# Altium PCB LED_EN_Kian_V2_troid.PcbDoc
Units mm, origin at the board's own origin, x right, y up, seen from the top; angles counter-clockwise.
Board outline 50.6 x 77.19 mm, 2 copper layers (Top Layer, Bottom Layer); 37 components, 17 nets, 103 pads, 239 vias.
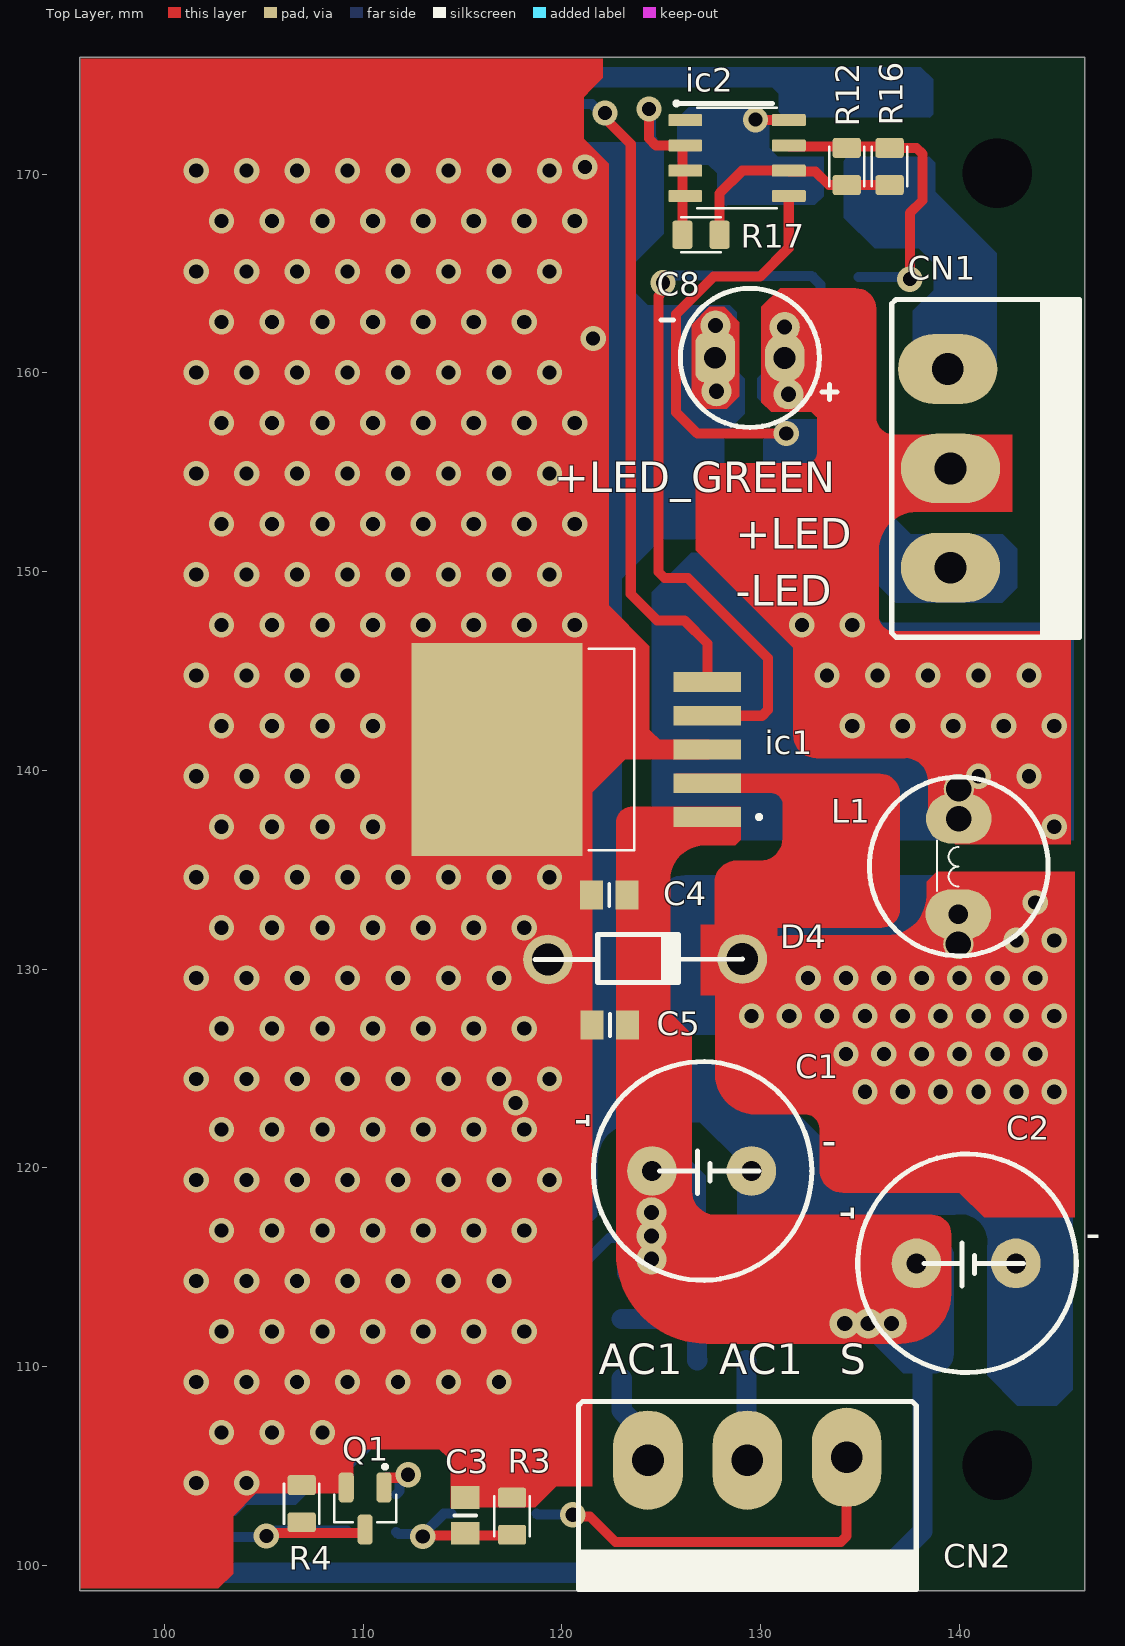
[diagram p0: Top Layer view]
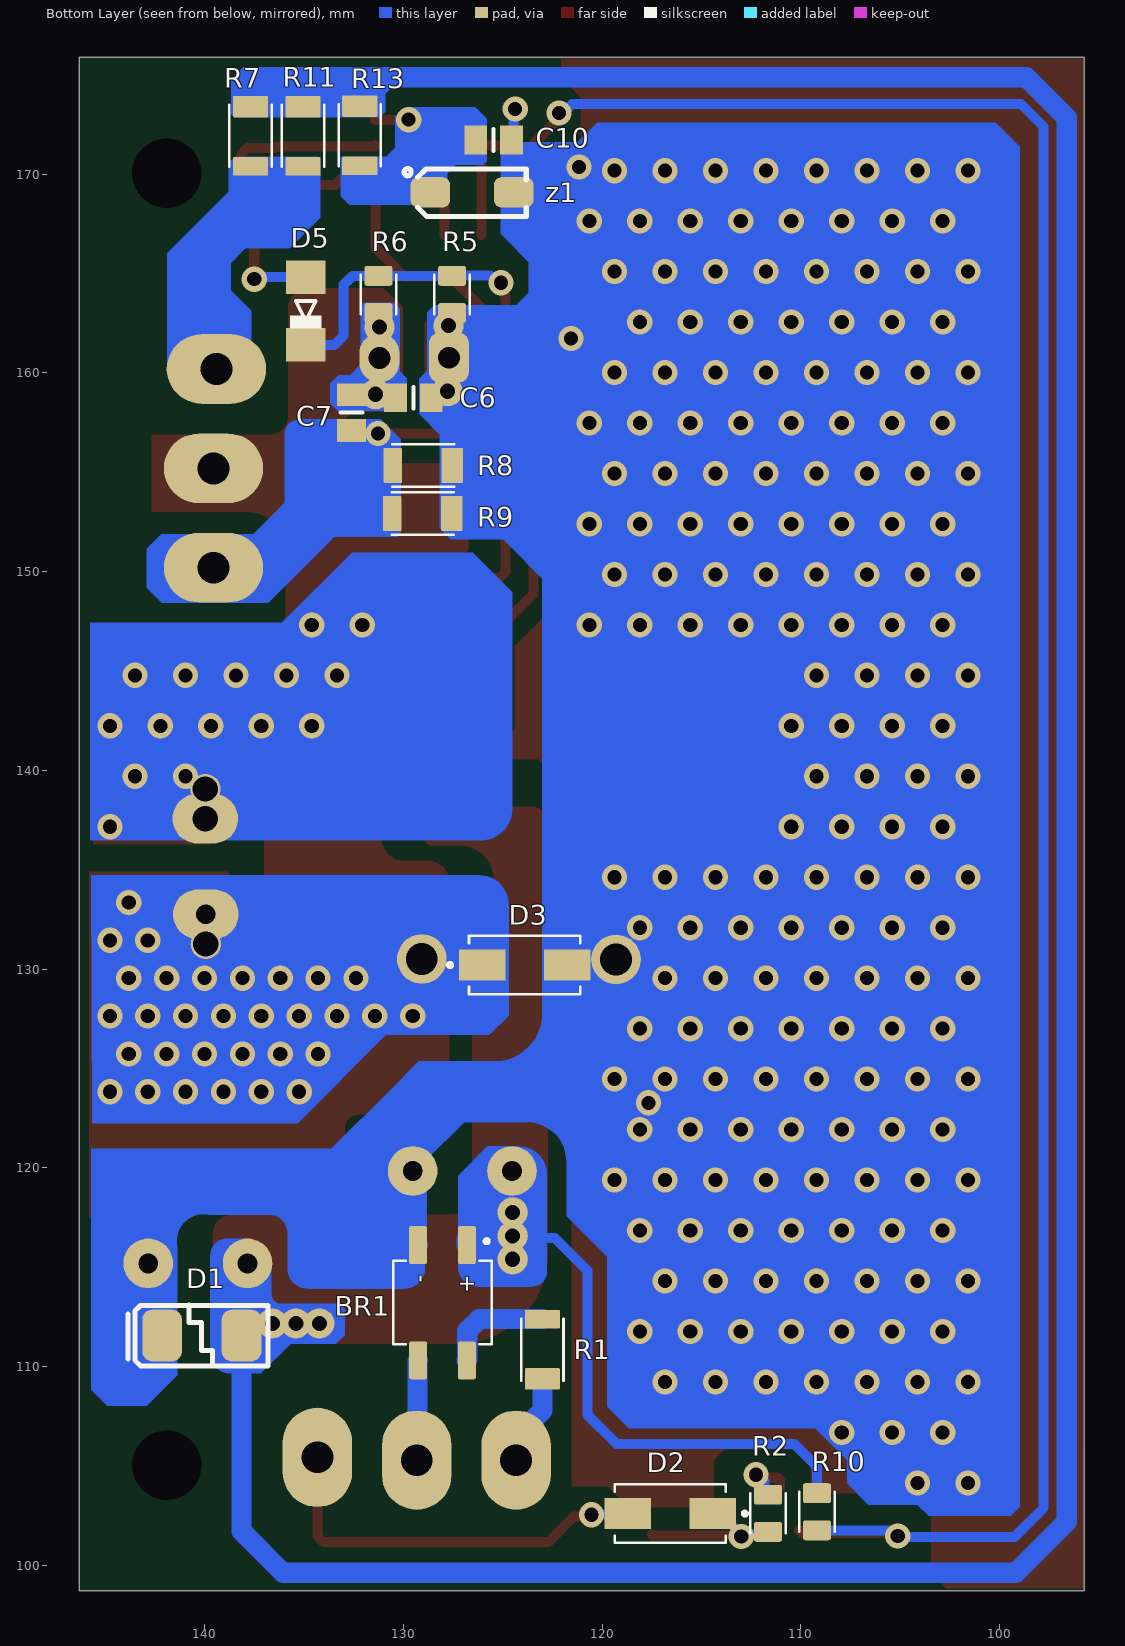
[diagram p1: Bottom Layer view, seen from below]
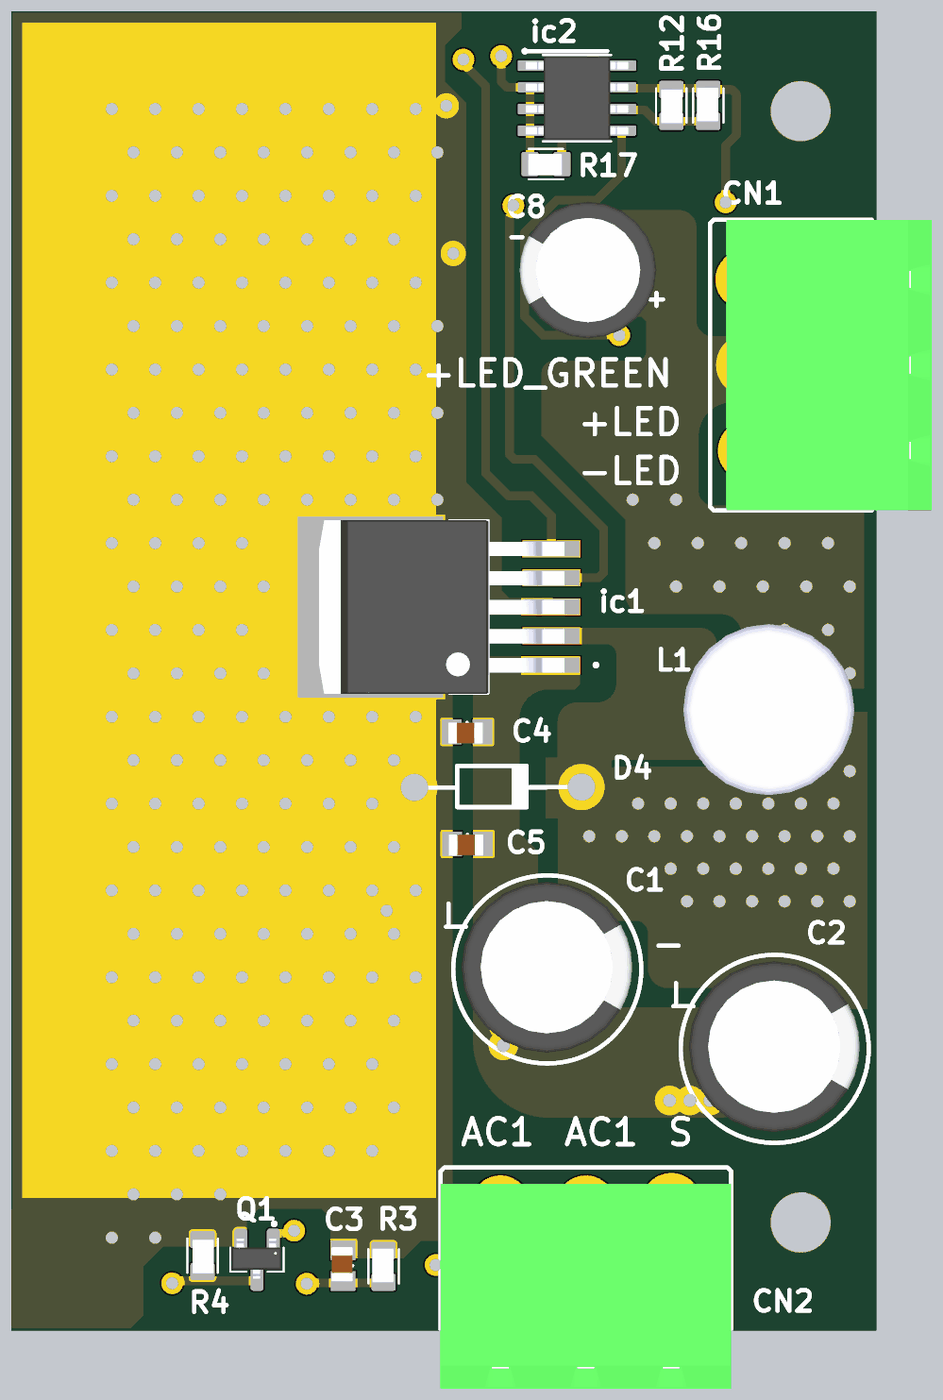
[diagram p2: 3D render of the assembled board from above, using the file's embedded part models]
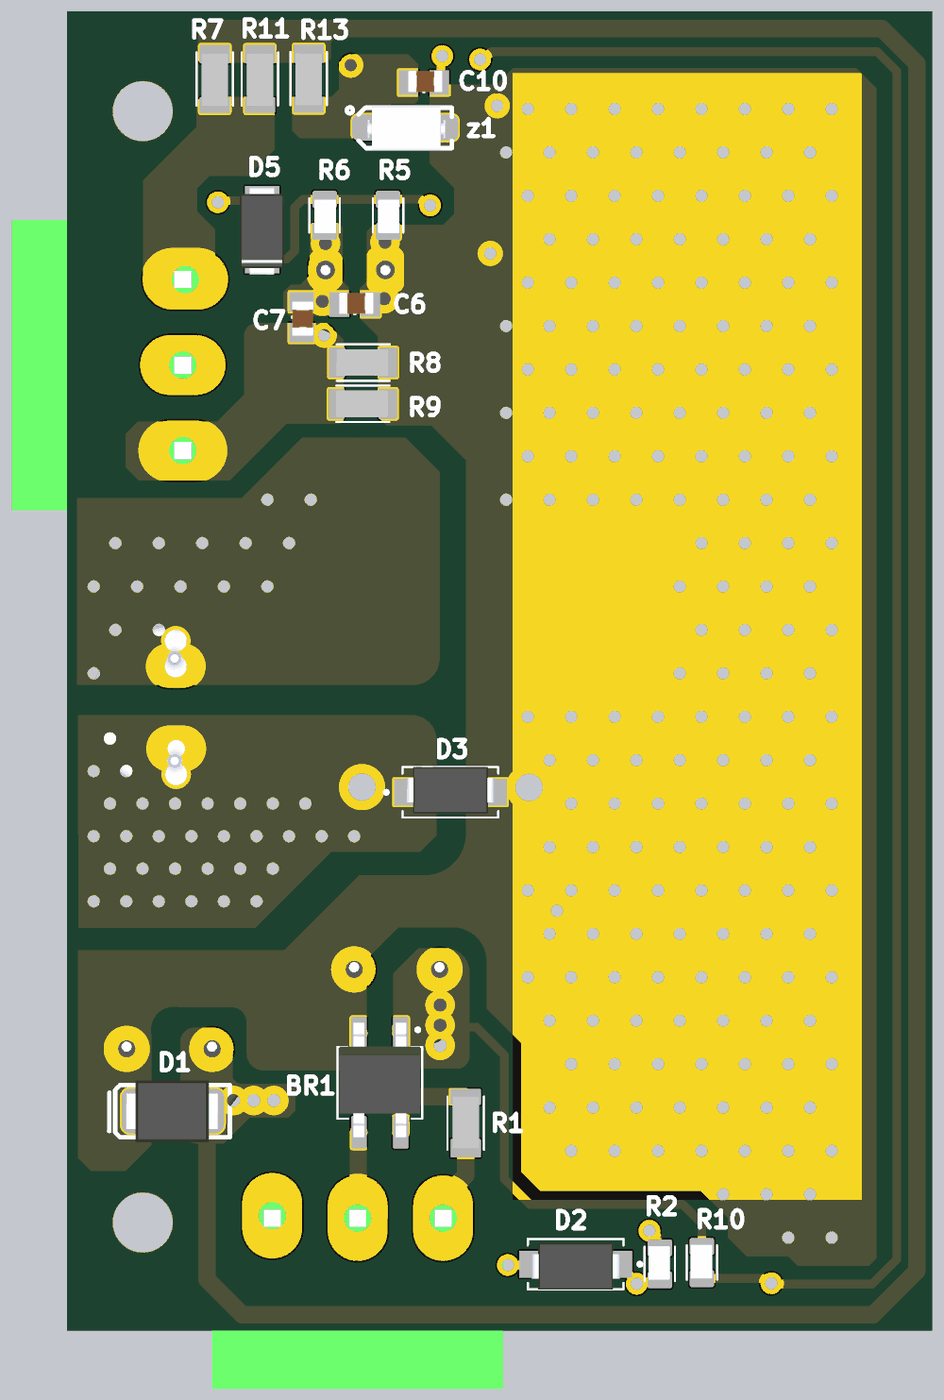
[diagram p3: 3D render of the assembled board from below, using the file's embedded part models]

## Layer stack, top to bottom
Top Solder: solder mask 0.0102, Solder Resist, Dk 3.5
Top Layer: signal copper 0.0356
Dielectric 1: dielectric 0.32, FR-4, Dk 4.8
Bottom Layer: signal copper 0.0356
Bottom Solder: solder mask 0.0102, Solder Resist, Dk 3.5

## Board outline
95.733,98.704 95.733,175.895 146.329,175.895 146.329,98.704

## Design rules (kind name [scope] priority, off if disabled: settings)
Clearance [All] p1: gap=0.381 ignorepadtopadclearanceinfootprint=FALSE
PolygonConnect [All] p1: connectstyle=Relief reliefconductorwidth=0.254 reliefentries=4 polygonreliefangle="90 Angle" airgapwidth=0.254
RoutingVias [All] p1: holewidth=0.711 width=1.27 viastyle="Through Hole" minholewidth=0.711 minwidth=1.27 maxholewidth=0.711 maxwidth=1.27
SolderMaskExpansion [All] p1: expansion=0.102 istentingtop=FALSE
Width [All] p1: maxlimit=2.54 minlimit=0.254 preferedwidth=0.254 minimp=50.000000 maximp=50.000000 favimp=50.000000
30 further rules are at their usual default settings.

## Classes and differential pairs
component class U_LED_EN_Kian_V2_SWITCHING: BR1 C1 C2 C3 C4 C5 C6 C7 C8 C10 D1 D2 D3 D4 D5 ic1 ic2 L1 Q1 R1 R2 R3 R4 R5 R6 R7 R8 R9 R10 R11 R13 R16 R17 z1
component class U_LED_EN_Kian_V2_CONECTOR: CN1 CN2

## Components (designator, comment, footprint, x,y, rotation, side; value= is the part's Value field where it differs from the comment)
BR1 "mb6s" MB6S/SMD 128.676,113.208 r90 bottom
C1 "330uF-50V" CAP-EL_P5MM 124.53,119.827 r0 top
C2 "330uF-50V" CAP-EL_P5MM 137.84,115.179 r0 top
C3 "100nF" CAP-0805 115.16,103.429 r270 top
C4 "100nF" CAP-0805 121.463,133.753 r0 top
C5 "100nF" CAP-0805 121.489,127.199 r0 top
C6 "100nF" CAP-0805 128.579,158.728 r0 bottom
C7 "100nF" CAP-0805 132.635,157.074 r90 bottom
C8 "1000uF-10V" CAP-EL-P3.5MM 127.716,160.757 r0 top
C10 "100nF" CAP-0805 124.54,171.708 r0 bottom
CN1 "LED_OUT" CONECTOR/FONIX/3PIN 139.565,150.198 r90 top
CN2 "INPUT-24-S" CONECTOR/FONIX/3PIN 124.337,105.283 r0 top
D1 "TVS-40V" TVS-5V-SMD 138.151,111.557 r0 bottom
D2 "M7" DIOD/1N4007/SMD 114.421,102.591 r0 bottom
D3 "1N5822" DIOD/1N4007/SMD 126.067,130.2 r180 bottom
D4 "1N5822" DIOD/1N4007/DIP 129.107,130.484 r180 top
D5 "1N4148" mini_melf 134.973,163.263 r90 bottom
ic1 "lm2576" lm2576 121.048,142.191 r180 top
ic2 "LM358" SOP-8 129.199,170.688 r0 top
L1 "100uH-3A" inductor-9*12 139.955,132.766 r90 top
Q1 "C945" SOT23 111.049,103.917 r270 top (schematic designator T1)
R1 "0R" RES/1206 122.885,110.846 r90 bottom
R2 "15K" RES/0805 112.592,103.66 r270 bottom
R3 "240K" RES/0805 116.567,103.513 r270 top
R4 "15K" RES/0805 107.842,102.045 r90 top
R5 "4.7K" RES/0805 126.625,162.904 r90 bottom
R6 "15K" RES/0805 130.334,162.904 r90 bottom
R7 "4.7K" RES/1206 137.828,171.933 r270 bottom
R8 "0.1R" RES/1206 129.014,155.473 r0 bottom
R9 "0.1R" RES/1206 129.039,153.06 r0 bottom
R10 "15K" RES/0805 110.128,103.736 r270 bottom
R11 "4.7K" RES/1206 135.186,171.933 r270 bottom (schematic designator R?)
R12 "100K" RES/0805 135.274,169.34 r90 top (schematic designator R?)
R13 "1K" RES/1206 132.334,171.958 r270 bottom
R16 "10K" RES/0805 135.566,171.436 r270 top
R17 "470R" RES/0805 125.956,166.021 r0 top
z1 "27v" DIOD/RS1J 126.473,169.194 r180 bottom

## Footprints (in the part's own frame and the unit in brackets; to place one, negate y for a bottom-side part, rotate by r counter-clockwise, add the part's x,y. Pads: shape width x height; smd on the part's side, far side on the other; paste and mask are expansions set on the pad)
CAP-0805 [mm]
  rect 1.15x1.45 smd: 1(0.025,-0.022) 2(1.825,-0.022)
  silkscreen extent 0.93,-0.57 0.93,0.53, body extent -0.17,-0.71 1.84,0.54, height 0.94
CAP-EL-P3.5MM [mm]
  oval 2x2.5 hole 1.1: +(3.5,0)
  rrect50% 2x2.5 hole 1.1: -(0,0.01)
  silkscreen extent -2.73,-3.5 6.13,3.5, body extent -2.25,-4 5.75,4, height 11.5
CAP-EL_P5MM [mm]
  round 2.5 hole 1: +(0.01,0.01) -(5.01,0.01)
  silkscreen extent -2.95,-5.49 8.05,5.51, body extent -2.48,-4.86 7.52,5.14, height 16
CONECTOR/FONIX/3PIN [mm]
  oval 3.5x5 hole 1.6: 1(0,0) 2(5,0) 3(10,0.144)
  silkscreen extent -3.5,-6.5 13.5,2.96, body extent -3.5,-10 13.5,2, height 8.8
DIOD/1N4007/DIP [mm]
  round 2.5 hole 1.6: A(9.8,0) K(0.025,-0.021)
  silkscreen extent 0.02,-1.26 10.46,1.15
DIOD/1N4007/SMD [mm]
  rect 2.33x1.56 smd: A(4.299,0) K(0.019,0)
  silkscreen extent -1.7,-1.48 4.96,1.48, body extent -0.44,-1.24 4.76,1.49, height 2.6
DIOD/RS1J [mm]
  rrect50% 2x1.524 smd: A(2.013,-0.106) K(-2.178,-0.106)
  silkscreen extent -3.5,-1.31 2.65,1.09, body extent -2.32,-1.44 2.28,1.16, height 2.1
inductor-9*12 [mm]
  oval 2.5x3.3 hole 1: 1(-0.01,0)
  oval 2.5x3.3 hole 1.27: 2(4.8,-0.025)
  silkscreen extent -2.1,-4.53 6.9,4.47, body extent -2.73,-5.09 7.27,4.91, height 12
lm2576 [mm]
  rect 3.4x1 smd paste-3 mask+0: 1(-6.282,4.543) 2(-6.282,2.843) 3(-6.282,1.143) 4(-6.282,-0.557) 5(-6.282,-2.257)
  rect 8.6x10.7 smd paste-6 mask+0: 6(4.318,1.143)
  silkscreen extent -8.98,-3.94 -0.3,6.22, body extent -7.04,-3.92 7.31,6.24, height 4.65
MB6S/SMD [mm]
  rrect23% 1.91x0.91 smd: +(2.9,-1.86) -(2.9,0.59) F(-2.9,0.59) N(-2.9,-1.86)
  silkscreen extent -2.1,-3.12 3.2,1.85, body extent -3.19,-3 3.51,1.72, height 2.9
mini_melf [mm]
  rect 1.7x2 smd: A(1.557,-0.049) K(-1.843,-0.049)
  silkscreen extent -1.01,-0.84 0.36,0.74, body extent -2.79,-1.31 2.35,1.25, height 2.5
RES/0805 [mm]
  rrect25% 1x1.42 smd: 1(0.113,0.933) 2(1.983,0.933)
  silkscreen extent 0.05,0.04 2.05,1.82, body extent 0,0.28 2,1.53, height 0.6
RES/1206 [mm]
  rrect14% 1.09x1.77 smd: 1(-1.469,0.131)
  rrect14% 0.94x1.77 smd: 2(1.536,0.131)
  silkscreen extent -1.55,-0.93 1.55,1.2, body extent -1.51,-0.65 1.59,0.9, height 0.55
SOP-8 [mm]
  rrect25% 1.71x0.61 smd: 1(-2.986,2.032) 2(-2.986,0.762) 3(-2.986,-0.508) 4(-2.986,-1.778) 5(2.224,-1.778) 6(2.224,-0.508) 7(2.224,0.762) 8(2.224,2.032)
  silkscreen extent -3.53,-2.4 1.62,2.98, body extent -3.38,-2.32 2.62,2.58, height 1.75
SOT23 [mil]
  rrect50% 60x30 smd: 1(0.24,0) 2(0.24,-74.8) 3(83.7,-37.4)
  silkscreen extent -45,-99 70,24, body extent -7,-96 86,19, height 44
TVS-5V-SMD [mm]
  rrect50% 2x2.6 smd: 1(4,0) 2(0,0)
  silkscreen extent -1.33,-1.53 5.72,1.54, body extent -0.66,-1.79 4.74,1.83, height 2.43

## Part data
BR1: library part "BRIDGE RECTIFIERS/SMD"
C1 C2 C8: library part cap-electrolit
C3 C4 C5 C6 C7 C10: library part cap_smd
CN1 CN2: library part CONECTOR/FONIX/3PIN
D1: library part TVS-SMD
D2 D3 D4 D5: library part DIOD/RECTIFIERS
L1: library part inductor
Q1: library part NPN
R1 R2 R3 R4 R5 R6 R7 R8 R9 R10 R11 R12 R13 R16 R17: library part RES/SMD
z1: library part zener-0.5w

## Free pads (board coordinates)
  round 1.524 hole 3.5: 13(141.91,105.029) 13(141.91,170.053)
  round 1.524 hole 1.27: 14(139.955,131.258) 14(139.979,139.065)
  round 1.524 hole 0.762: 15(124.511,117.754) 15(134.239,112.166) 16(124.511,115.392) 16(136.601,112.166) 17(124.511,116.573) 17(135.42,112.166) 18(131.216,162.306) 19(131.405,158.928) 20(127.737,162.382) 21(127.787,159.08)

## Via types
v1: diameter 1.27, hole 0.711, Top Layer to Bottom Layer, 239 vias

## Nets (pads, with @x,y where several pads share a name; then routed paths per layer and width w, separated by ;. In a path a pad name is that pad's centre, name@x,y a point inside that pad or via, vN(x,y) a via of type N, cw(c..) or ccw(c..) an arc to the next point about the centre after c; other vN are vias at no path point)
+12: C10.2 ic2.8 R13.2 z1.K | length 12.2
  Top Layer w0.508: v1(129.743,172.745) 129.769,172.72 ic2.8
  Bottom Layer w0.508: C10.2 129.692,171.729 129.743,171.679 ; z1.K 128.744,169.181 129.692,169.181 ; 129.743,169.181 129.743,170.383 ; v1(129.743,172.745) 129.743,171.679 ; R13.2 129.782,170.422 129.743,170.383 ; 129.743,170.383 129.743,171.679
+24: BR1.+ C1.+ C2.+ C4.2 C5.2 D1.2 ic1.1 pad.15 pad.16 pad.17 R7.1 R10.1 R11.1 R13.1 | length 241.6
  Top Layer w1.016: ic1.1 127.322,137.64 124.711,137.64 123.288,136.217 C4.2 123.288,127.203 C5.2 123.314,122.685 124.256,121.743 124.256,120.121 C1.+ 124.54,116.862 126.213,115.189 C2.+
  Bottom Layer w0.508: R10.1 109.195,104.953 110.338,106.096 119.278,106.096 120.752,107.569 120.752,114.833 122.386,116.468 124.511,116.468 125.34,116.468
  Bottom Layer w1.016: C1.+ 124.745,119.632 124.745,117.063 125.34,116.468 126.763,116.468 126.816,116.415 BR1.+ ; R7.1 137.684,173.414 132.216,173.414 R13.1 131.863,173.427 131.826,173.464 131.826,174.853 131.801,174.879 98.654,174.879 96.622,172.847 96.622,102.184 99.187,99.619 136.068,99.619 138.151,101.702 D1.2 138,111.707 138,115.038 C2.+
+LED_G: CN1.3 R7.2 R11.2 | length 13.8
  Bottom Layer w0.508: R11.2 R7.2 137.697,167.154 139.725,165.125 139.725,160.503 CN1.3
+LED_OUT: C6.2 C7.2 C8.+ CN1.2 L1.2 pad.14@139.979,139.065 pad.18 pad.19 R6.1 | length 40.9
  Top Layer w1.016: C8.+ 131.655,160.318 133.441,160.318 134.036,159.723 134.036,154.432 ; CN1.2 139.238,155.524 135.128,155.524 134.036,154.432 ; L1.2 139.979,144.475 139.192,145.263 136.703,145.263 134.036,147.93 134.036,154.432
  Bottom Layer w0.508: C6.2 130.478,158.825 pad.19@131.508,158.825
  Bottom Layer w1.016: R6.1 131.25,163.017 131.242,163.009 131.242,160.782 C8.+ 131.405,160.568 pad.19 pad.19@131.508,158.825
  other v1: 144.78,137.16 140.97,139.7 143.51,139.7 134.62,142.24 137.16,142.24 139.7,142.24 142.24,142.24 144.78,142.24 133.35,144.78 135.89,144.78 138.43,144.78 140.97,144.78 143.51,144.78 132.08,147.32 134.62,147.32
-LED_OUT: C7.1 CN1.1 ic2.5 R8.2 R9.2 | length 36.2
  Top Layer w0.508: v1(131.293,156.947) 126.822,156.947 125.755,158.013 125.755,162.966 127.635,164.846 129.972,164.846 131.423,166.297 ic2.5
  Bottom Layer w1.016: 130.626,156.257 132.414,156.257 132.613,156.058 132.613,154.33 133.1,153.844 ; 130.652,153.844 133.1,153.844 ; CN1.1 139.3,150.462 136.481,150.462 134.95,151.994 134.95,153.249 134.355,153.844 133.1,153.844
AC1: CN2.1 R1.1 | length 4.6
  Bottom Layer w1.016: R1.1 123.016,107.776 124.337,106.455 CN2.1
AC2: BR1.F CN2.2 | length 5.1
  Bottom Layer w1.016: BR1.F 129.302,110.273 129.302,105.318 CN2.2
EN: ic1.5 Q1.3 R4.1 R10.2 | length 143.4
  Top Layer w0.508: v1(105.131,101.473) 105.276,101.619 109.972,101.619 110.099,101.746 Q1.3 ; v1(122.174,173.076) 122.174,172.869 122.377,172.666 122.377,172.618 123.469,171.526 123.469,148.869 124.79,147.549 126.162,147.549 127.33,146.38 ic1.5
  Bottom Layer w0.508: R10.2 105.616,101.752 105.337,101.473 v1(105.131,101.473) 105.08,101.422 99.238,101.422 97.79,102.87 97.79,172.399 98.924,173.533 121.511,173.533 121.968,173.076 v1(122.174,173.076)
GND: BR1.- C1.- C2.- C3.1 C4.1 C5.1 C6.1 C8.- C10.1 D1.1 D3.A D4.A ic1.3 ic1.6 ic2.2 ic2.3 ic2.4 pad.20 pad.21 Q1.2 R3.1 R4.2 R5.1 R8.1 R9.1 R17.1 z1.A | length 107.3
  Top Layer w0.508: R4.2 106.909,106.07 108.336,107.498 109.149,107.498 Q1.2 ; C3.1 115.138,106.655 115.418,106.934 116.637,106.934 117.5,106.07 R3.1 ; 120.066,171.069 120.447,171.45 ; v1(124.384,173.279) 124.384,171.798 124.732,171.45 ic2.2@126.121,171.45 ; R17.1 126.07,171.399 ic2.2@126.121,171.45 ; ic2.2 ic2.2@126.121,171.45
  Top Layer w1.016: ic1.6 ic1.3
  Bottom Layer w0.508: 118.745,168.859 124.231,168.859 z1.A 124.512,169.14 124.512,171.677 C10.1 124.474,171.82 124.474,173.188 v1(124.384,173.279) ; v1@119.151,160.223 119.297,160.369 127.319,160.369 C8.-@127.644,160.694 ; 126.99,154.448 127.545,155.003 R8.1 ; R5.1 127.638,162.938 127.638,160.845 C8.- C8.-@127.644,160.694 ; R9.1 127.644,153.003 C8.-@127.644,160.694 ; pad.21@127.991,158.572 128.426,158.572 C6.1
  Bottom Layer w1.016: v1(117.678,123.266) 118.288,123.876 128.945,123.876 129.54,123.281 C1.- ; BR1.- 129.319,116.161 129.319,119.617 C1.- ; D1.1 142.151,114.088 142.85,114.787 C2.- 142.566,115.473 142.566,117.708 140.437,119.837 C1.-
  other v1: 101.6,104.14 104.14,104.14 102.87,106.68 105.41,106.68 107.95,106.68 101.6,109.22 104.14,109.22 106.68,109.22 109.22,109.22 111.76,109.22 114.3,109.22 116.84,109.22 102.87,111.76 105.41,111.76 107.95,111.76 110.49,111.76 113.03,111.76 115.57,111.76 118.11,111.76 101.6,114.3 104.14,114.3 106.68,114.3 109.22,114.3 111.76,114.3 114.3,114.3 116.84,114.3 102.87,116.84 105.41,116.84 107.95,116.84 110.49,116.84 113.03,116.84 115.57,116.84 118.11,116.84 101.6,119.38 104.14,119.38 106.68,119.38 109.22,119.38 111.76,119.38 114.3,119.38 116.84,119.38 119.38,119.38 102.87,121.92 105.41,121.92 107.95,121.92 110.49,121.92 113.03,121.92 115.57,121.92 118.11,121.92 101.6,124.46 104.14,124.46 106.68,124.46 109.22,124.46 111.76,124.46 114.3,124.46 116.84,124.46 119.38,124.46 102.87,127 105.41,127 107.95,127 110.49,127 113.03,127 115.57,127 118.11,127 101.6,129.54 104.14,129.54 106.68,129.54 109.22,129.54 111.76,129.54 114.3,129.54 116.84,129.54 102.87,132.08 105.41,132.08 107.95,132.08 110.49,132.08 113.03,132.08 115.57,132.08 118.11,132.08 101.6,134.62 104.14,134.62 106.68,134.62 109.22,134.62 111.76,134.62 114.3,134.62 116.84,134.62 119.38,134.62 102.87,137.16 105.41,137.16 107.95,137.16 110.49,137.16 101.6,139.7 104.14,139.7 106.68,139.7 109.22,139.7 102.87,142.24 105.41,142.24 107.95,142.24 110.49,142.24 101.6,144.78 104.14,144.78 106.68,144.78 109.22,144.78 102.87,147.32 105.41,147.32 107.95,147.32 110.49,147.32 113.03,147.32 115.57,147.32 118.11,147.32 120.65,147.32 101.6,149.86 104.14,149.86 106.68,149.86 109.22,149.86 111.76,149.86 114.3,149.86 116.84,149.86 119.38,149.86 102.87,152.4 105.41,152.4 107.95,152.4 110.49,152.4 113.03,152.4 115.57,152.4 118.11,152.4 120.65,152.4 101.6,154.94 104.14,154.94 106.68,154.94 109.22,154.94 111.76,154.94 114.3,154.94 116.84,154.94 119.38,154.94 102.87,157.48 105.41,157.48 107.95,157.48 110.49,157.48 113.03,157.48 115.57,157.48 118.11,157.48 120.65,157.48 101.6,160.02 104.14,160.02 106.68,160.02 109.22,160.02 111.76,160.02 114.3,160.02 116.84,160.02 119.38,160.02 121.578,161.728 102.87,162.56 105.41,162.56 107.95,162.56 110.49,162.56 113.03,162.56 115.57,162.56 118.11,162.56 101.6,165.1 104.14,165.1 106.68,165.1 109.22,165.1 111.76,165.1 114.3,165.1 116.84,165.1 119.38,165.1 102.87,167.64 105.41,167.64 107.95,167.64 110.49,167.64 113.03,167.64 115.57,167.64 118.11,167.64 120.65,167.64 101.6,170.18 104.14,170.18 106.68,170.18 109.22,170.18 111.76,170.18 114.3,170.18 116.84,170.18 119.38,170.18 121.172,170.364
ic_fb: D5.K ic1.4 R5.2 R6.2 | length 40.7
  Top Layer w0.508: v1(125.095,164.541) 124.949,164.395 124.949,163.945 124.866,163.863 124.866,149.98 125.164,149.682 126.34,149.682 130.378,145.644 130.378,143.046 130.081,142.748 ic1.4
  Bottom Layer w0.508: v1(125.095,164.541) 125.301,164.541 125.665,164.905 127.541,164.905 R5.2 R6.2 132.572,164.887 132.765,164.694 133.02,164.44 133.02,161.874 133.495,161.399 134.903,161.399 D5.K
NetBR1_F: BR1.N R1.2 | length 5.5
  Bottom Layer w1.016: R1.2 126.202,112.382 126.797,111.787 126.797,110.327 BR1.N
NetC3_2: C3.2 D2.K R2.2 R3.2 | length 7.9
  Top Layer w0.508: v1(113.005,101.448) 113.045,101.488 117.459,101.488 R3.2
  Bottom Layer w0.508: R2.2 111.773,101.562 112.89,101.562 v1(113.005,101.448) 113.005,101.541 114.055,102.591 D2.K
NetD3_K: D3.K D4.K ic1.2 L1.1 pad.14@139.955,131.258
  other v1: 135.255,123.825 137.16,123.825 139.065,123.825 140.97,123.825 142.875,123.825 144.78,123.825 134.302,125.73 136.207,125.73 138.112,125.73 140.017,125.73 141.922,125.73 143.827,125.73 129.54,127.635 131.445,127.635 133.35,127.635 135.255,127.635 137.16,127.635 139.065,127.635 140.97,127.635 142.875,127.635 144.78,127.635 132.398,129.54 134.302,129.54 136.207,129.54 138.112,129.54 140.017,129.54 141.922,129.54 143.827,129.54 142.875,131.445 144.78,131.445 143.827,133.35
NetD5_A: D5.A ic2.7 R12.2 R16.1 | length 16.1
  Top Layer w0.508: ic2.7 131.474,171.399 134.341,171.399 136.424,171.399 R16.1 137.853,171.323 138.151,171.025 138.151,168.681 137.516,168.046 v1(137.516,164.719)
  Bottom Layer w0.508: D5.A 137.414,164.821 v1(137.516,164.719)
Netic2_6: ic2.6 R12.1 R16.2 R17.2 | length 11.4
  Top Layer w0.508: R17.2 127.94,169.037 129.083,170.18 ic2.6 131.474,170.129 132.766,170.129 133.442,169.453 R12.1 R16.2
NetR2_1: Q1.1 R2.1 | length 3
  Top Layer w0.508: Q1.1 111.049,104.274 111.176,104.401 112.122,104.401 v1(112.268,104.546)
  Bottom Layer w0.508: R2.1 111.836,103.724 111.836,104.249 112.134,104.546 v1(112.268,104.546)
SIGNAL: CN2.3 D2.A | length 20.3
  Top Layer w0.508: v1(120.548,102.54) 120.638,102.45 121.418,102.45 122.7,101.168 134.039,101.168 134.337,101.466 CN2.3
  Bottom Layer w0.508: D2.A 118.77,102.54 v1(120.548,102.54)
pads on no net: ic2.1

## Other copper
Top Layer:
  rectangle net NetD3_K: 128.803,129.972 130.861,132.867
  rectangle net NetD3_K: 126.975,128.676 128.753,132.232
  rectangle net GND: 115.849,103.962 121.539,139.421
  rectangle net GND: 95.783,105.816 121.107,175.819
  region net +LED_OUT: 138.43,137.643 138.43,139.471 ccw(c137.287,139.471) 137.287,140.614 132.817,140.614 cw(c132.817,141.783) 131.648,141.783 131.648,146.177 126.746,151.079 126.746,154.737 cw(c127.457,154.737) 127.457,155.448 132.283,155.448 ccw(c132.283,156.032) 132.867,156.032 132.867,158.293 ccw(c132.156,158.293) 132.156,159.004 131.242,159.004 cw(c131.242,159.969) 130.277,159.969 130.277,162.535 cw(c132.004,162.535) 132.004,164.262 134.798,164.262 cw(c134.798,163.246) 135.814,163.246 135.814,157.81 ccw(c136.728,157.81) 136.728,156.896 142.672,156.896 142.672,153.01 137.897,153.01 ccw(c137.897,151.054) 135.941,151.054 135.941,147.803 ccw(c136.754,147.803) 136.754,146.99 145.618,146.99 145.618,136.271 139.802,136.271
  region net NetD3_K: 129.997,130.226 130.15,130.226 130.327,130.404 130.327,130.861 cw(c131.166,130.861) 131.166,131.699 136.373,131.699 ccw(c136.373,133.68) 138.354,133.68 138.354,134.391 138.862,134.899 145.821,134.899 145.821,117.5 141.249,117.5 140.005,118.745 134.137,118.745 cw(c134.137,119.913) 132.969,119.913 132.969,121.971 ccw(c132.258,121.971) 132.258,122.682 129.769,122.682 cw(c129.769,124.739) 127.711,124.739 127.711,130.15
  region net NetD3_K: 125.654,139.751 125.73,139.827 136.017,139.827 cw(c136.017,138.836) 137.008,138.836 137.008,132.994 cw(c136.093,132.994) 136.093,132.08 130.937,132.08 ccw(c130.937,131.14) 129.997,131.14 129.997,130.226 129.896,130.226 129.337,129.667 129.083,129.921 127.686,129.921 127.686,134.341 cw(c128.803,134.341) 128.803,135.458 129.997,135.458 ccw(c129.997,136.576) 131.115,136.576 131.115,138.278 ccw(c130.531,138.278) 130.531,138.862 128.295,138.862
  region net +24: 129.007,138.151 128.981,138.176 123.571,138.176 ccw(c123.571,137.338) 122.733,137.338 122.733,115.697 ccw(c127.279,115.697) 127.279,111.15 137.084,111.15 ccw(c137.084,113.665) 139.598,113.665 139.598,116.662 ccw(c138.633,116.662) 138.633,117.627 127.737,117.627 cw(c127.737,118.821) 126.543,118.821 126.543,126.721 125.451,127.813 125.451,134.493 cw(c127.178,134.493) 127.178,136.22 128.727,136.22 129.007,136.5
  region net +LED_OUT: 132.74,164.262 130.988,164.262 130.048,163.322 130.048,158.521 130.531,158.039 132.563,158.039 132.817,157.785 133.691,157.785
  region net GND: 128.168,163.322 128.93,162.56 128.93,158.826 128.295,158.191 127.025,158.191 126.543,158.674 126.543,162.433 127.432,163.322
  region net GND: 119.939,137.312 123.292,140.665 127.483,140.665 128.016,141.199 127.787,141.427 125.019,141.427 124.409,142.037 124.409,146.253 122.352,148.311 122.352,170.536 121.056,171.831 120.574,171.831 120.574,173.355 122.072,174.854 122.072,175.819 121.107,175.819 120.244,174.955 119.786,174.955
  region net GND: 96.647,106.68 95.707,105.74 95.707,98.831 102.718,98.831 103.454,99.568 103.454,102.464 104.597,103.607 109.169,103.607 109.499,103.937 109.499,105.131 110.388,106.02 113.665,106.02 114.402,105.283 114.402,102.895 114.427,102.87 114.478,102.921 118.669,102.921 119.888,104.14 120.548,104.14 121.133,104.724 121.107,104.75 121.107,106.68
Bottom Layer:
  region net +24: 136.627,115.189 136.652,115.164 136.652,113.64 cw(c136.169,113.64) 136.169,113.157 133.223,113.157 132.944,112.878 132.969,112.852 132.969,111.582 133.401,111.15 135.687,111.15 137.185,109.652 138.735,109.652 ccw(c138.735,110.642) 139.725,110.642 139.725,115.595 ccw(c138.887,115.595) 138.887,116.434 137.897,116.434
  region net +24: 124.206,121.082 125.781,121.082 127.254,119.609 127.254,115.011 cw(c126.263,115.011) 126.263,114.021 123.546,114.021 cw(c123.546,114.783) 122.784,114.783 122.784,119.659 cw(c124.206,119.659)
  region net +LED_OUT: 145.771,136.474 126.111,136.474 cw(c126.111,138.049) 124.536,138.049 124.536,148.971 126.517,150.952 132.588,150.952 136.119,147.422 145.771,147.422
  region net NetD3_K: 145.672,122.25 135.331,122.25 130.886,126.695 125.679,126.695 124.714,127.66 124.714,133.248 cw(c126.187,133.248) 126.187,134.722 145.72,134.722
  region net -LED_OUT: 130.15,156.667 131.14,157.658 135.23,157.658 cw(c135.23,156.896) 135.992,156.896 135.992,153.467 137.566,151.892 142.189,151.892 142.926,151.155 142.926,149.2 142.164,148.438 136.804,148.438 133.477,151.765 130.353,151.765 130.15,151.968 130.15,152.146
  region net GND: 103.581,102.489 104.14,103.048 106.604,103.048 107.671,104.115 107.671,105.283 109.271,106.883 118.669,106.883 119.761,107.975 119.761,115.519 121.793,117.551 121.793,120.294 cw(c123.8,120.294) 123.8,122.301 126.949,122.301 128.93,120.32 128.93,114.935 ccw(c129.946,114.935) 129.946,113.919 134.823,113.919 ccw(c134.823,114.935) 135.839,114.935 135.839,116.738 cw(c136.728,116.738) 136.728,117.627 139.802,117.627 cw(c140.078,116.304) 141.402,116.027 141.402,109.55 142.926,108.026 144.907,108.026 145.72,108.839 145.72,120.955 133.629,120.955 130.607,123.977 129.235,125.349 125.425,125.349 cw(c125.425,127.762) 123.012,127.762 123.012,164.897 125.12,167.005 125.12,171.196 124.714,171.602 121.234,171.602 120.244,172.593 100.203,172.593 98.984,171.374 98.984,102.946 99.441,102.489
  region net +12: 129.743,173.304 129.667,173.38 126.39,173.38 125.806,172.796 125.806,170.663 125.984,170.485 127.381,170.485 127.813,170.053 127.813,168.834 128.27,168.377 128.346,168.453 132.74,168.453 133.172,168.885 133.172,170.891 130.861,170.891 130.429,171.323 130.429,172.898 130.277,173.05
  region net +LED_OUT: 131.978,163.525 132.156,163.347 132.156,160.426 132.69,159.893 133.274,159.893 133.68,159.487 133.68,158.445 133.325,158.09 130.505,158.09 129.845,158.75 129.845,159.741 130.2,160.096 130.2,163.22 130.505,163.525
  region net GND: 122.733,149.377 124.993,151.638 127.635,151.638 128.168,152.171 128.168,156.896 129.21,157.937 129.21,159.715 128.803,160.122 128.803,163.043 128.448,163.398 124.333,163.398 123.698,164.033 123.698,165.583 124.943,166.827 121.742,166.827
  region net +LED_G: 134.341,170.891 138.481,170.891 138.786,170.586 138.786,169.113 141.884,166.014 141.884,160.249 141.249,160.249 140.64,159.639 139.573,160.706 138.151,160.706 138.151,160.807 137.668,161.29 137.668,163.119 138.709,164.16 138.709,165.532 137.973,166.268 135.738,166.268 134.188,167.818 134.188,170.663
  region net +24: 131.623,175.387 138.074,175.387 138.684,174.777 138.684,173.025 138.506,172.847 138.481,172.872 131.191,172.872 130.912,173.152 130.912,174.041 130.378,174.574 129.921,174.574

## Silkscreen, mask and mechanical layers (free items; w line width, h text height)
Top Overlay:
  text "+LED_GREEN" at 119.609,154 h1.52
  text "+LED" at 128.75,151.143 h1.52
  text "-LED" at 128.75,148.285 h1.52
  text "AC1" at 121.869,109.601 h1.52
  text "AC1" at 127.927,109.601 h1.52
  text "S" at 133.985,109.601 h1.52
Top Solder:
  rectangle: 96.368,106.451 120.574,175.235
Bottom Solder:
  rectangle: 99.822,106.35 120.269,172.288
Mechanical 1:
  the board outline again, w0.254

## Text inside footprints (layer, text, board x,y; h text height)
BR1: Bottom Overlay "-" at 129.441,114.607 h0.81 r90; Bottom Overlay "+" at 127.151,114.607 h0.81 r90
C1: Top Overlay "-" at 133.07,120.632 h1.52; Top Overlay "-" at 120.624,121.739 h1.52; Top Overlay "-" at 121.893,121.991 h1.52 r90
C2: Top Overlay "-" at 146.379,115.984 h1.52; Top Overlay "-" at 133.934,117.091 h1.52; Top Overlay "-" at 135.202,117.343 h1.52 r90